# EAGLE board PCB Wersja 3 (EAGLE 9.4.1)
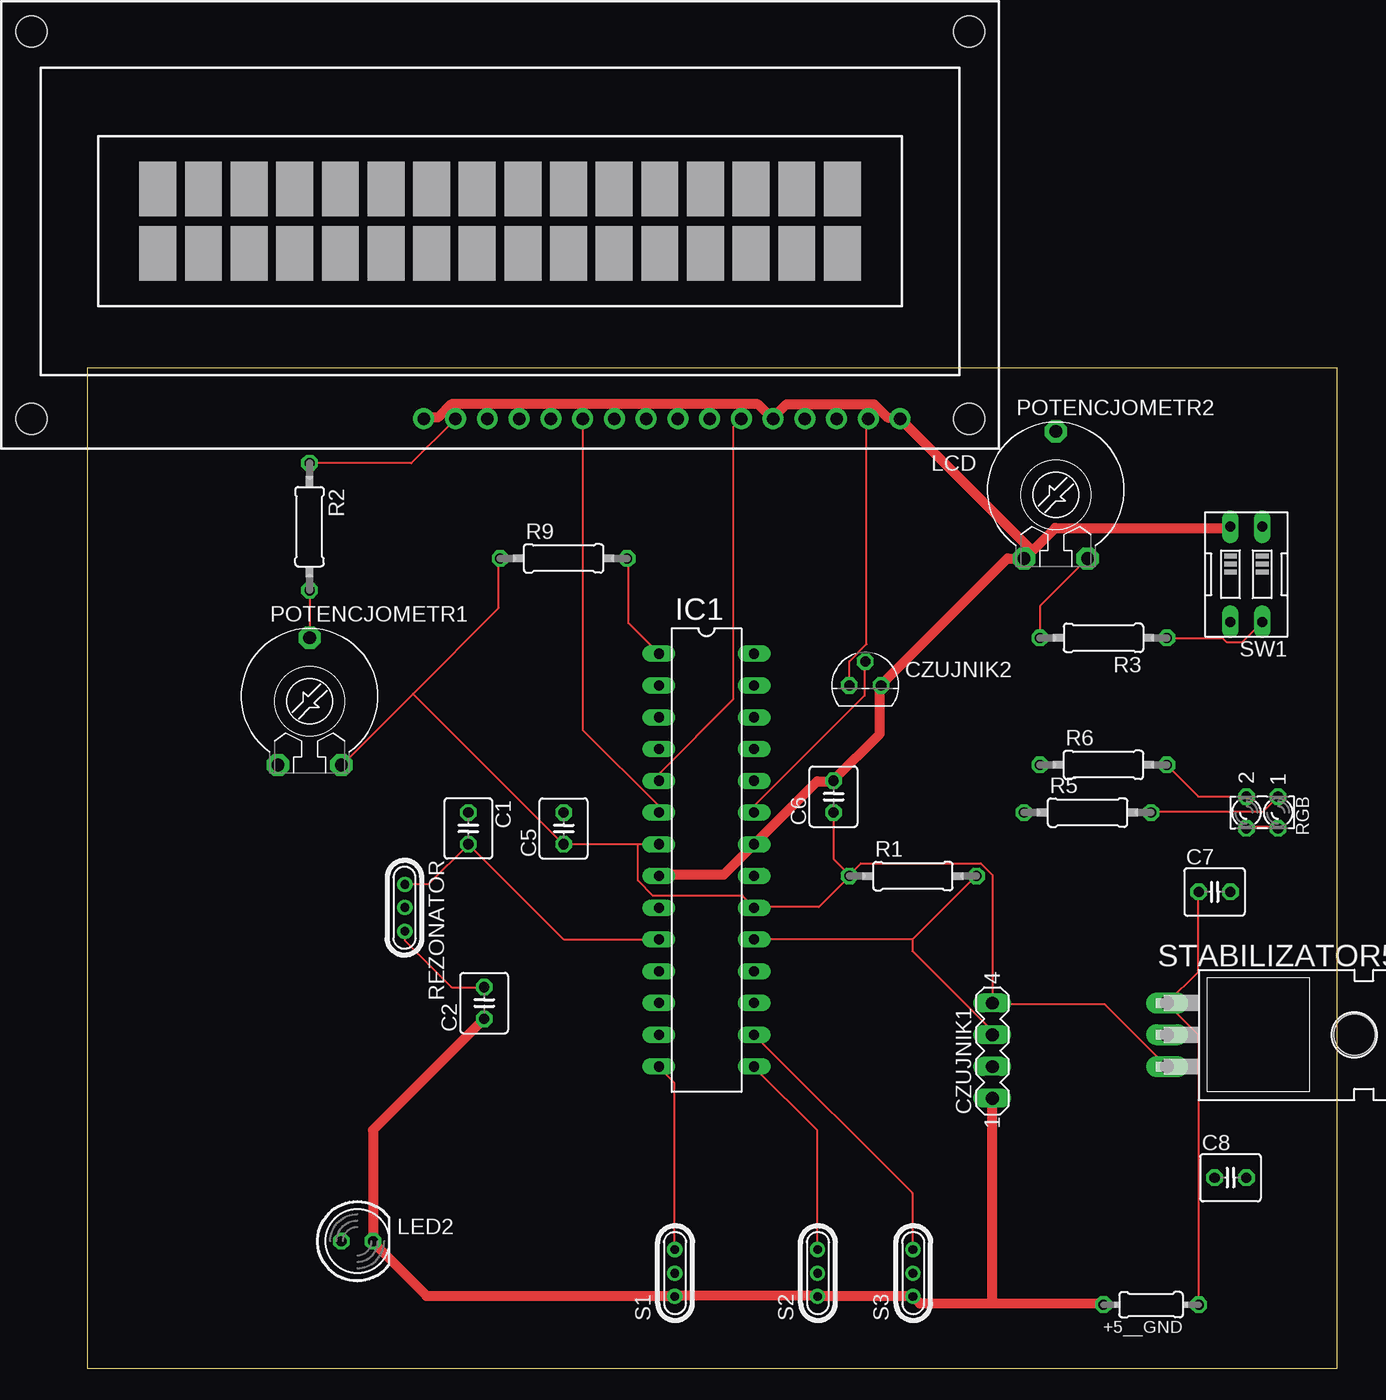
[diagram p0: board, top side]
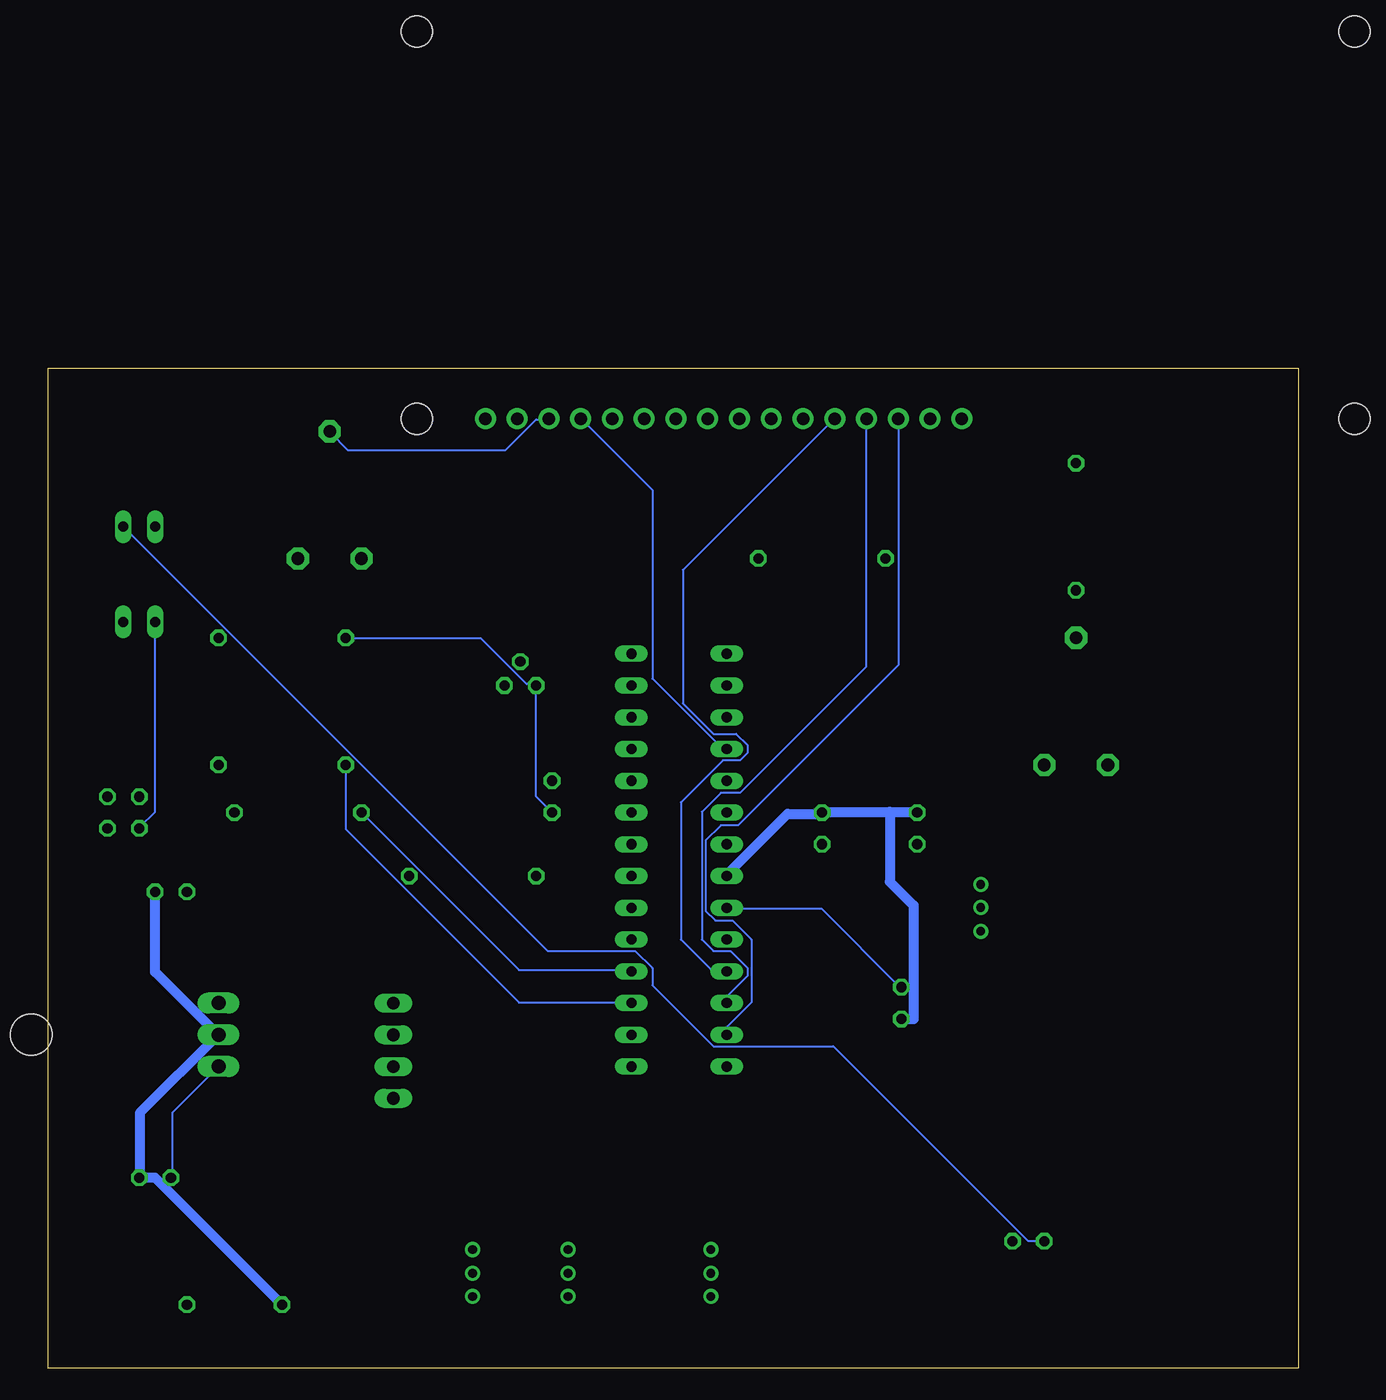
[diagram p1: board, bottom side, seen from below]

Size 100 x 80 mm. Coordinates in mm from the lower left corner, seen from the top.
Outline: 0,0 100,0 100,80 0,80 0,0
Copper layers (1*16): Top 0.035mm / dielectric 1.5mm / Bottom 0.035mm
Design rules "default": minimum track width 6mil, minimum drill 0.35mm, track to track 6mil, track to pad 6mil, pad to pad 6mil, via to via 6mil, smd to smd 6mil, copper to edge 40mil, drill to drill 6mil, minimum pad ring 10mil, minimum via ring 8mil, stop-mask expansion 4mil, vias tented up to drill 0mil, thermal gap 10mil

## Footprints (pad centres in the part's own frame; a part is rotated, then mirrored left to right if it is on the bottom)
0204/7 = drill 0.813 octagon: 1 -3.81,0; 2 3.81,0
C025-040X050 = drill 0.813 octagon: 1 -1.27,0; 2 1.27,0
MA04-1 = drill 1.016 long: 1 -3.81,0; 2 -1.27,0; 3 1.27,0; 4 3.81,0
TO92 = drill 0.813 octagon: 1 1.27,0; 2 0,1.905; 3 -1.27,0
DIL28-3 = drill 0.813 long: 1 -16.51,-3.81; 2 -13.97,-3.81; 3 -11.43,-3.81; 4 -8.89,-3.81; 5 -6.35,-3.81; 6 -3.81,-3.81; 7 -1.27,-3.81; 8 1.27,-3.81; 9 3.81,-3.81; 10 6.35,-3.81; 11 8.89,-3.81; 12 11.43,-3.81; 13 13.97,-3.81; 14 16.51,-3.81; 15 16.51,3.81; 16 13.97,3.81; 17 11.43,3.81; 18 8.89,3.81; 19 6.35,3.81; 20 3.81,3.81; 21 1.27,3.81; 22 -1.27,3.81; 23 -3.81,3.81; 24 -6.35,3.81; 25 -8.89,3.81; 26 -11.43,3.81; 27 -13.97,3.81; 28 -16.51,3.81
TUXGR_16X2_R2 = drill 1 pad 1.676: 1 -32,15.5; 2 -29.46,15.5; 3 -26.92,15.5; 4 -24.38,15.5; 5 -21.84,15.5; 6 -19.3,15.5; 7 -16.76,15.5; 8 -14.22,15.5; 9 -11.68,15.5; 10 -9.14,15.5; 11 -6.6,15.5; 12 -4.06,15.5; 13 -1.52,15.5; 14 1.02,15.5; 15 3.56,15.5; 16 6.1,15.5 | hole 2.5: -37.5,-15.5; 37.5,-15.5; -37.5,15.5; 37.5,15.5
LED5MM = drill 0.813 octagon: A -1.27,0; K 1.27,0
PT-10 = drill 1.016 pad 1.778 octagon: 1 -2.54,-5.08; 2 2.54,-5.08; 3 0,5.08
0207/10 = drill 0.813 octagon: 1 -5.08,0; 2 5.08,0
UM1 = drill 0.7 pad 1.2: 1 -1.875,0; 2 -0.027,0; 3 1.875,0
LZR182 = drill 0.813 octagon: A1 -1.27,1.27; A2 -1.27,-1.27; K1 1.27,1.27; K2 1.27,-1.27
TO220H = drill 1.118 long: 1 -2.54,-10.16; 2 0,-10.16; 3 2.54,-10.16 | hole 3.302: 0,4.826
EDG-02 = drill 0.813 long: 1 -1.27,-3.81; 2 1.27,-3.81; 3 1.27,3.81; 4 -1.27,3.81

## Placement (x,y rotation side)
+5__GND  [0204/7]  85.09,5.08 180 top
C1  [C025-040X050]  30.48,43.18 270 top
C2  [C025-040X050]  31.75,29.21 90 top
C5  [C025-040X050]  38.1,43.18 90 top
C6  [C025-040X050]  59.69,45.72 90 top
C7  [C025-040X050]  90.17,38.1 0 top
C8  [C025-040X050]  91.44,15.24 0 top
CZUJNIK1  [MA04-1]  72.39,25.4 90 top
CZUJNIK2  BC238  [TO92]  62.23,54.61 0 top
IC1  MEGA8-P  [DIL28-3]  49.53,40.64 270 top
LCD  TUXGR_16X2_R2  [TUXGR_16X2_R2]  33.02,91.44 180 top
LED2  [LED5MM]  21.59,10.16 0 top
POTENCJOMETR1  [PT-10]  17.78,53.34 0 top
POTENCJOMETR2  [PT-10]  77.47,69.85 0 top
R1  [0207/10]  66.04,39.37 0 top
R2  [0207/10]  17.78,67.31 270 top
R3  [0207/10]  81.28,58.42 180 top
R5  [0207/10]  80.01,44.45 0 top
R6  [0207/10]  81.28,48.26 0 top
R9  [0207/10]  38.1,64.77 0 top
REZONATOR  16M20AUM1  [UM1]  25.4,36.83 270 top
RGB  LZR182  [LZR182]  93.98,44.45 270 top
S1  16M20AUM1  [UM1]  46.99,7.62 90 top
S2  16M20AUM1  [UM1]  58.42,7.62 90 top
S3  16M20AUM1  [UM1]  66.04,7.62 90 top
STABILIZATOR5V  7805T  [TO220H]  96.52,26.67 270 top
SW1  [EDG-02]  92.71,63.5 180 top

## Library data of the parts
+5__GND R1-R3 R5 R6 R9 = rcl; SPICEPREFIX: R
C1 C2 C5-C8 = rcl; SPICEPREFIX: C
CZUJNIK1 = con-lstb; OC_FARNELL: unknown; OC_NEWARK: unknown
CZUJNIK2 = transistor-neu-to92
IC1 = atmel; OC_FARNELL: unknown; OC_NEWARK: unknown
LCD = display-lcd; OC_FARNELL: unknown; OC_NEWARK: unknown
LED2 RGB = led
POTENCJOMETR1 POTENCJOMETR2 = rcl; SPICEMODEL: POT; SPICEPREFIX: X
REZONATOR S1-S3 = crystal; OC_FARNELL: unknown; OC_NEWARK: unknown
STABILIZATOR5V = linear
SW1 = special

## Nets
DIPSWITCH: RGB.K1 RGB.K2 SW1.3
N$1: R3.1 SW1.4
N$2: IC1.18 R5.1
N$3: R5.2 RGB.A1
N$4: CZUJNIK2.2 IC1.23
N$5: CZUJNIK1.3 IC1.19 R1.2
N$6: IC1.16 S3.3
N$7: IC1.15 S2.3
N$8: IC1.14 S1.3
N$9: POTENCJOMETR1.3 R2.2
N$10: LED2.A SW1.1
N$11: LCD.15 R2.1
N$12: IC1.17 R6.1
N$13: LCD.3 POTENCJOMETR2.3
N$14: R6.2 RGB.A2
N$15: C2.2 IC1.9 REZONATOR.3
N$16: IC1.4 LCD.4
N$17: C1.2 IC1.10 REZONATOR.1
N$18: C5.1 C6.1 C8.1 CZUJNIK1.4 CZUJNIK2.3 IC1.7 IC1.20 LCD.2 POTENCJOMETR1.2 POTENCJOMETR2.2 R1.1 R3.2 R9.1 STABILIZATOR5V.3
N$19: +5__GND.2 C1.1 C2.1 C5.2 C6.2 C7.2 C8.2 CZUJNIK1.1 CZUJNIK2.1 IC1.8 IC1.22 LCD.1 LCD.5 LCD.16 LED2.K POTENCJOMETR2.1 S1.1 S2.1 S3.1 STABILIZATOR5V.2 SW1.2
N$20: IC1.1 R9.2
N$21: IC1.5 LCD.6
N$22: IC1.13 LCD.14
N$23: IC1.12 LCD.13
N$24: IC1.11 LCD.12
N$25: IC1.6 LCD.11
N$26: +5__GND.1 C7.1 STABILIZATOR5V.1

## Tracks (layer width: path | path; a pad name or v marks a point on that pad's centre or on a via)
DIPSWITCH
  Top 0.152: RGB.K2 92.81,43.28 95.25,43.28 RGB.K1
  Bottom 0.152: SW1.3 91.44,44.5 92.66,43.28 RGB.K2
N$1
  Top 0.152: SW1.4 92.35,58.06 91.14,58.06 90.83,58.37 86.41,58.37 R3.1
N$2
  Bottom 0.152: R5.1 62.33,31.85 53.34,31.85 IC1.18
N$3
  Top 0.152: RGB.A1 94.03,44.5 85.19,44.5 R5.2
N$4
  Top 0.152: IC1.23 53.34,44.96 62.18,53.8 62.18,56.39 CZUJNIK2.2
N$5
  Top 0.152: 65.99,34.29 IC1.19 | 65.99,34.29 71.02,39.32 R1.2 | CZUJNIK1.3 72.39,26.98 65.99,33.38 65.99,34.29
N$6
  Top 0.152: IC1.16 65.99,14.02 65.99,9.6 S3.3
N$7
  Top 0.152: S2.3 58.37,9.6 58.37,19.05 53.34,24.08 IC1.15
N$8
  Top 0.152: S1.3 46.94,9.6 46.94,22.86 45.72,24.08 IC1.14
N$9
  Top 0.152: R2.2 17.83,62.18 17.83,58.52 POTENCJOMETR1.3
N$10
  Bottom 0.152: SW1.1 60.05,33.38 53.03,33.38 51.66,32 51.66,30.63 46.79,25.76 37.19,25.76 21.64,10.21 20.42,10.21 LED2.A
N$11
  Top 0.152: R2.1 25.91,72.39 29.41,75.89 LCD.15
N$12
  Bottom 0.152: R6.1 76.2,43.13 62.33,29.26 53.34,29.26 IC1.17
N$13
  Bottom 0.152: LCD.3 60.05,75.89 60.96,75.89 63.4,73.46 76.05,73.46 77.42,74.83 POTENCJOMETR2.3
N$14
  Top 0.152: RGB.A2 88.85,45.72 86.41,48.16 R6.2
N$15
  Top 0.152: REZONATOR.3 25.4,34.24 29.16,30.48 C2.2
  Bottom 0.152: IC1.9 45.72,36.73 38.1,36.73 31.85,30.48 C2.2
N$16
  Bottom 0.152: IC1.4 46.02,49.53 51.66,55.17 51.66,70.26 57.3,75.89 LCD.4
N$17
  Top 0.152: REZONATOR.1 25.45,38.71 27.28,38.71 C1.2 38.1,34.29 IC1.10
N$18
  Top 0.152: STABILIZATOR5V.3 81.38,29.11 72.39,29.11 CZUJNIK1.4 72.39,39.47 71.48,40.39 61.87,40.39 60.96,39.47 | 26.06,53.95 20.42,48.31 POTENCJOMETR1.2 | 26.06,53.95 32.92,60.81 32.92,64.77 R9.1 | R3.2 76.2,60.96 POTENCJOMETR2.2 | IC1.7 44.04,41.91 | 44.04,41.91 C5.1 26.06,53.95 | 53.34,36.88 58.52,36.88 60.96,39.32 R1.1 60.96,39.47 | 60.96,39.47 59.74,40.69 59.74,44.35 C6.1 | CZUJNIK2.3 60.96,56.54 62.33,57.91 62.33,75.89 LCD.2 | 44.04,41.91 44.04,39.01 45.26,37.8 52.43,37.8 53.34,36.88 | 53.34,36.88 IC1.20
  Bottom 0.152: STABILIZATOR5V.3 90.07,20.42 90.07,15.24 C8.1 | C6.1 60.96,45.72 CZUJNIK2.3 60.96,54.71 61.72,54.71 65.38,58.37 76.2,58.37 R3.2
N$19
  Top 0.152: 47.09,5.79 S1.1 46.94,5.79 | 58.37,5.79 S2.1 58.52,5.79 | 65.99,5.79 S3.1 66.14,5.64 | 81.23,5.18 +5__GND.2 | 91.44,67.21 SW1.2 | 74.98,64.77 POTENCJOMETR2.1 | 26.98,76.05 LCD.16 | 54.71,76.05 LCD.5 54.86,76.05 | 64.92,76.05 LCD.1 65.08,75.89 | 45.72,39.47 IC1.8 | 59.59,46.94 C6.2 59.74,47.09 | 63.4,54.56 CZUJNIK2.1 63.55,54.71 | 22.86,10.06 LED2.K
  Top 0.813: 58.37,5.79 47.09,5.79 | 58.52,5.79 65.99,5.79 | 72.39,5.18 66.6,5.18 66.14,5.64 | 72.39,5.18 81.23,5.18 | 72.39,5.18 CZUJNIK1.1 | 91.44,67.21 77.42,67.21 75.59,65.38 | 74.98,64.77 75.59,65.38 | 26.98,76.05 28.04,76.05 29.11,77.11 53.65,77.11 54.71,76.05 | 64.92,76.05 64.01,76.05 62.94,77.11 55.93,77.11 54.86,76.05 | 65.08,75.89 75.59,65.38 | LED2.K 22.86,19.05 C2.1 | 45.72,39.47 50.9,39.47 IC1.22 58.37,46.94 59.59,46.94 | 63.4,54.56 63.4,50.75 59.74,47.09 | POTENCJOMETR2.1 73.61,64.77 63.55,54.71 | 46.94,5.79 27.13,5.79 22.86,10.06
  Bottom 0.152: 86.41,26.67 STABILIZATOR5V.2 | 92.66,15.24 C8.2 | 30.48,44.5 C1.1 | 38.1,44.5 C5.2 38.1,44.35 | 45.72,39.47 IC1.8
  Bottom 0.813: C7.2 91.44,31.7 86.41,26.67 92.66,20.42 92.66,15.24 91.44,15.24 +5__GND.2 | 38.1,44.5 32.66,44.5 | 32.66,44.5 30.48,44.5 | 38.1,44.35 40.84,44.35 45.72,39.47 | C2.1 30.79,27.94 30.79,37.03 32.66,38.91 32.66,44.5
N$20
  Top 0.152: IC1.1 43.28,59.59 43.28,64.77 R9.2
N$21
  Top 0.152: IC1.5 45.72,47.55 51.66,53.49 51.66,75.29 52.27,75.89 LCD.6
N$22
  Bottom 0.152: IC1.13 45.72,27.28 43.74,29.26 43.74,34.29 45.26,35.81 46.63,35.81 47.4,36.58 47.4,42.22 46.18,43.43 44.81,43.43 32,56.24 32,75.89 LCD.14
N$23
  Bottom 0.152: IC1.12 45.72,29.72 44.04,31.39 44.04,32 45.41,33.38 46.79,33.38 47.7,34.29 47.7,44.5 46.18,46.02 44.65,46.02 34.59,56.08 34.59,75.89 LCD.13
N$24
  Bottom 0.152: IC1.11 45.72,31.85 46.94,31.85 49.38,34.29 49.38,45.26 46.02,48.62 44.65,48.62 44.04,49.23 44.04,49.84 44.96,50.75 46.79,50.75 49.23,53.19 49.23,63.86 37.19,75.89 LCD.12
N$25
  Top 0.152: IC1.6 45.72,44.96 39.62,51.05 39.62,75.89 LCD.11
N$26
  Top 0.152: +5__GND.1 88.85,5.18 88.85,26.67 86.41,29.11 STABILIZATOR5V.1 88.85,31.7 88.85,38.1 C7.1